# Altium PCB Sensor.PcbDoc
Units mm, origin at the board's own origin, x right, y up, seen from the top; angles counter-clockwise.
Board outline 45 x 30 mm, 4 copper layers (SIG 1, GND, PWR, SIG 2), stack 1.57 mm thick; 35 components, 31 nets, 190 pads, 119 vias.
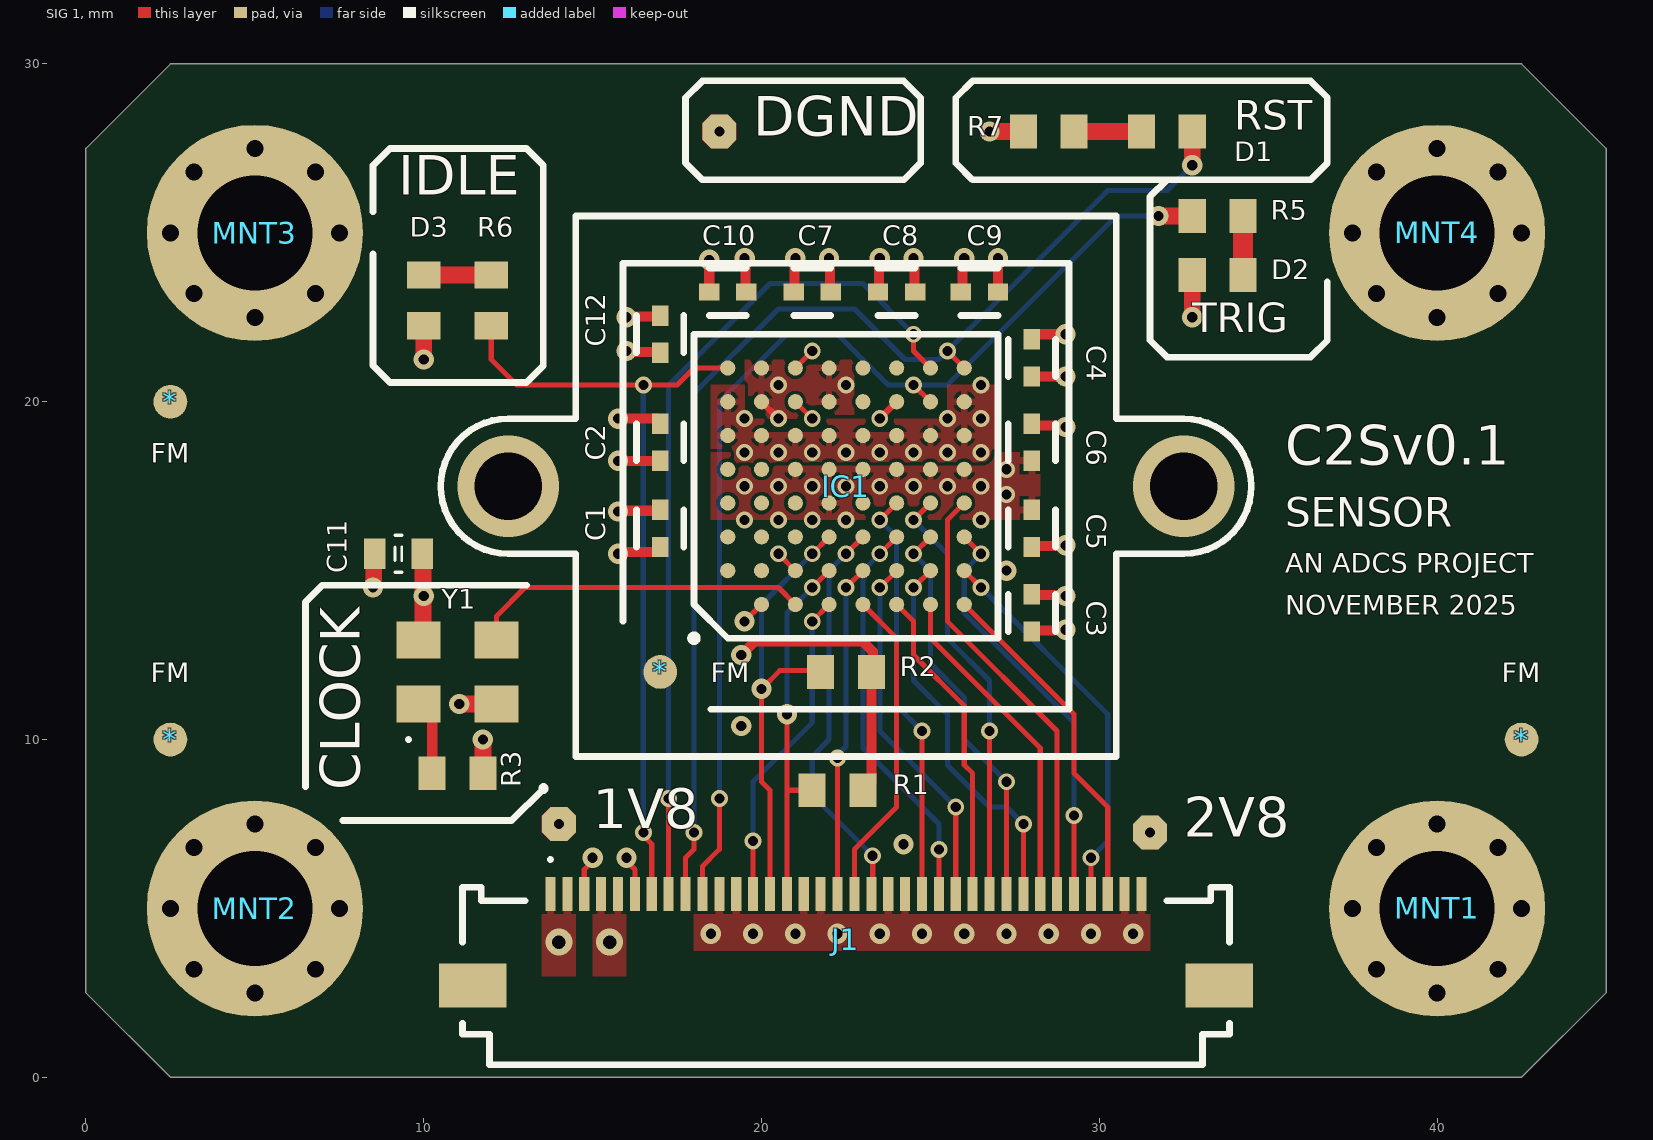
[diagram p0: SIG 1 view]
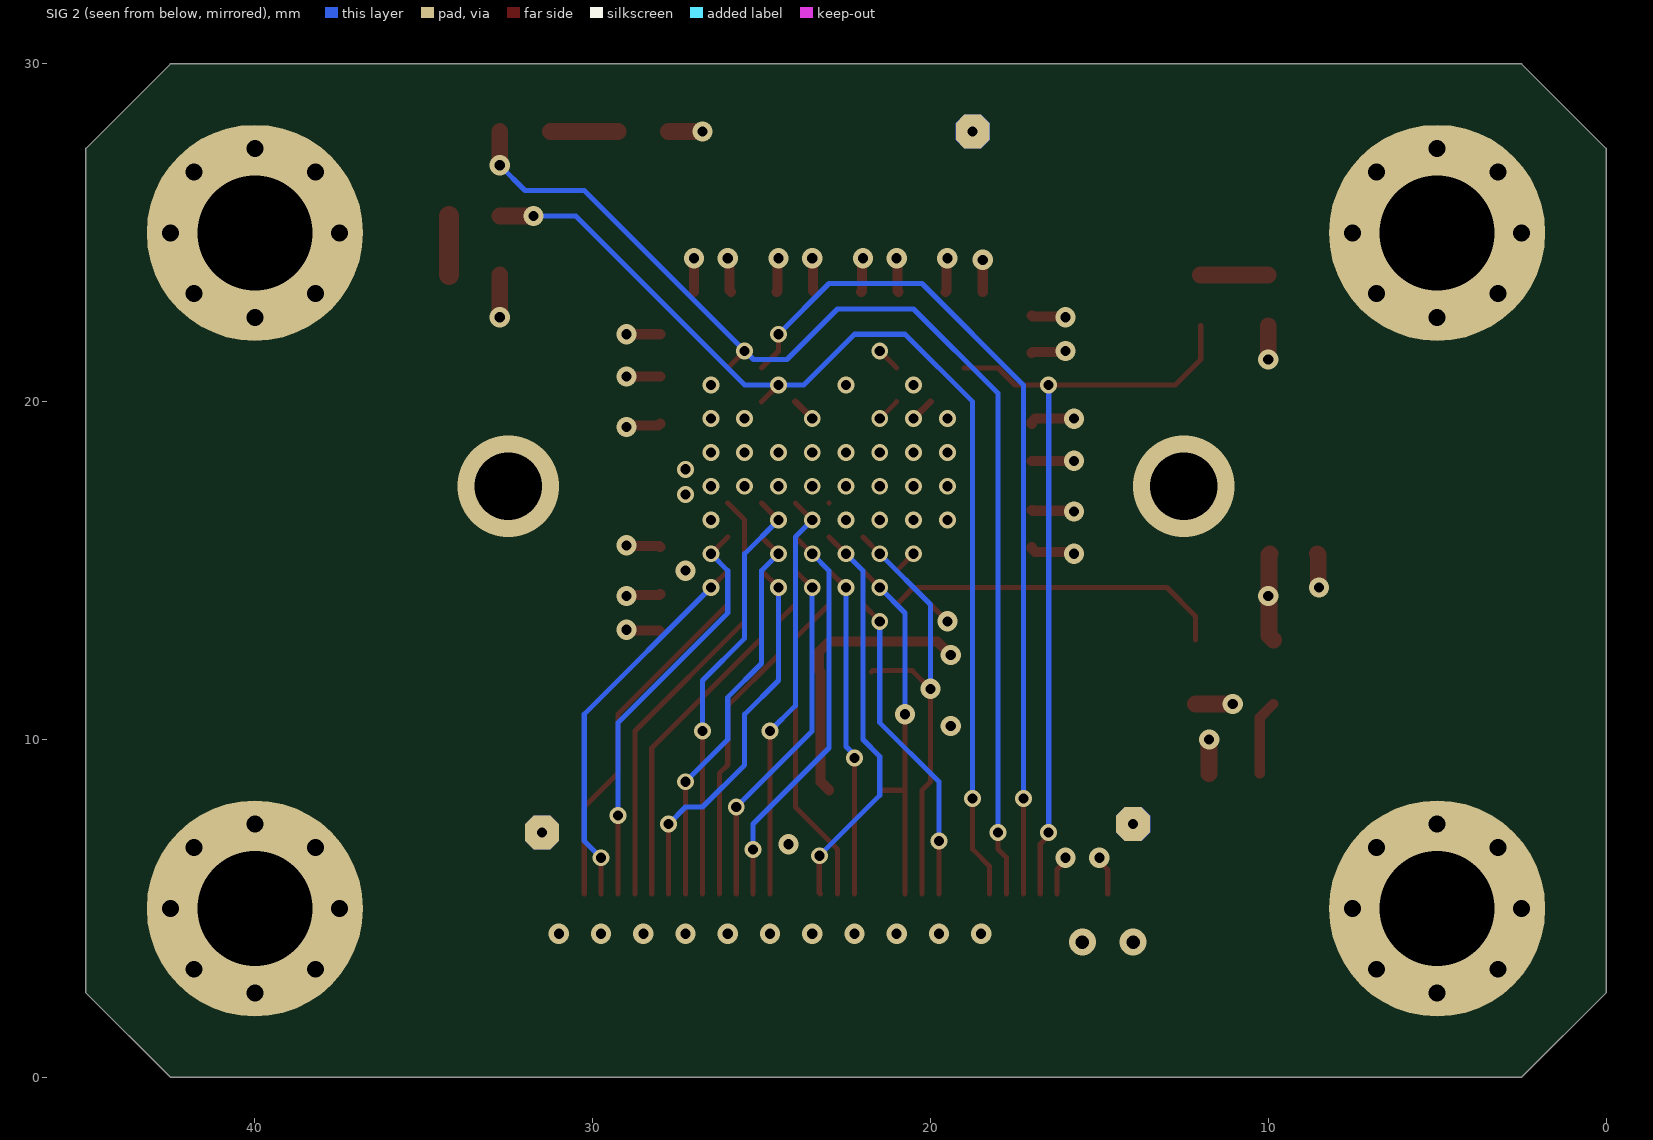
[diagram p1: SIG 2 view, seen from below]
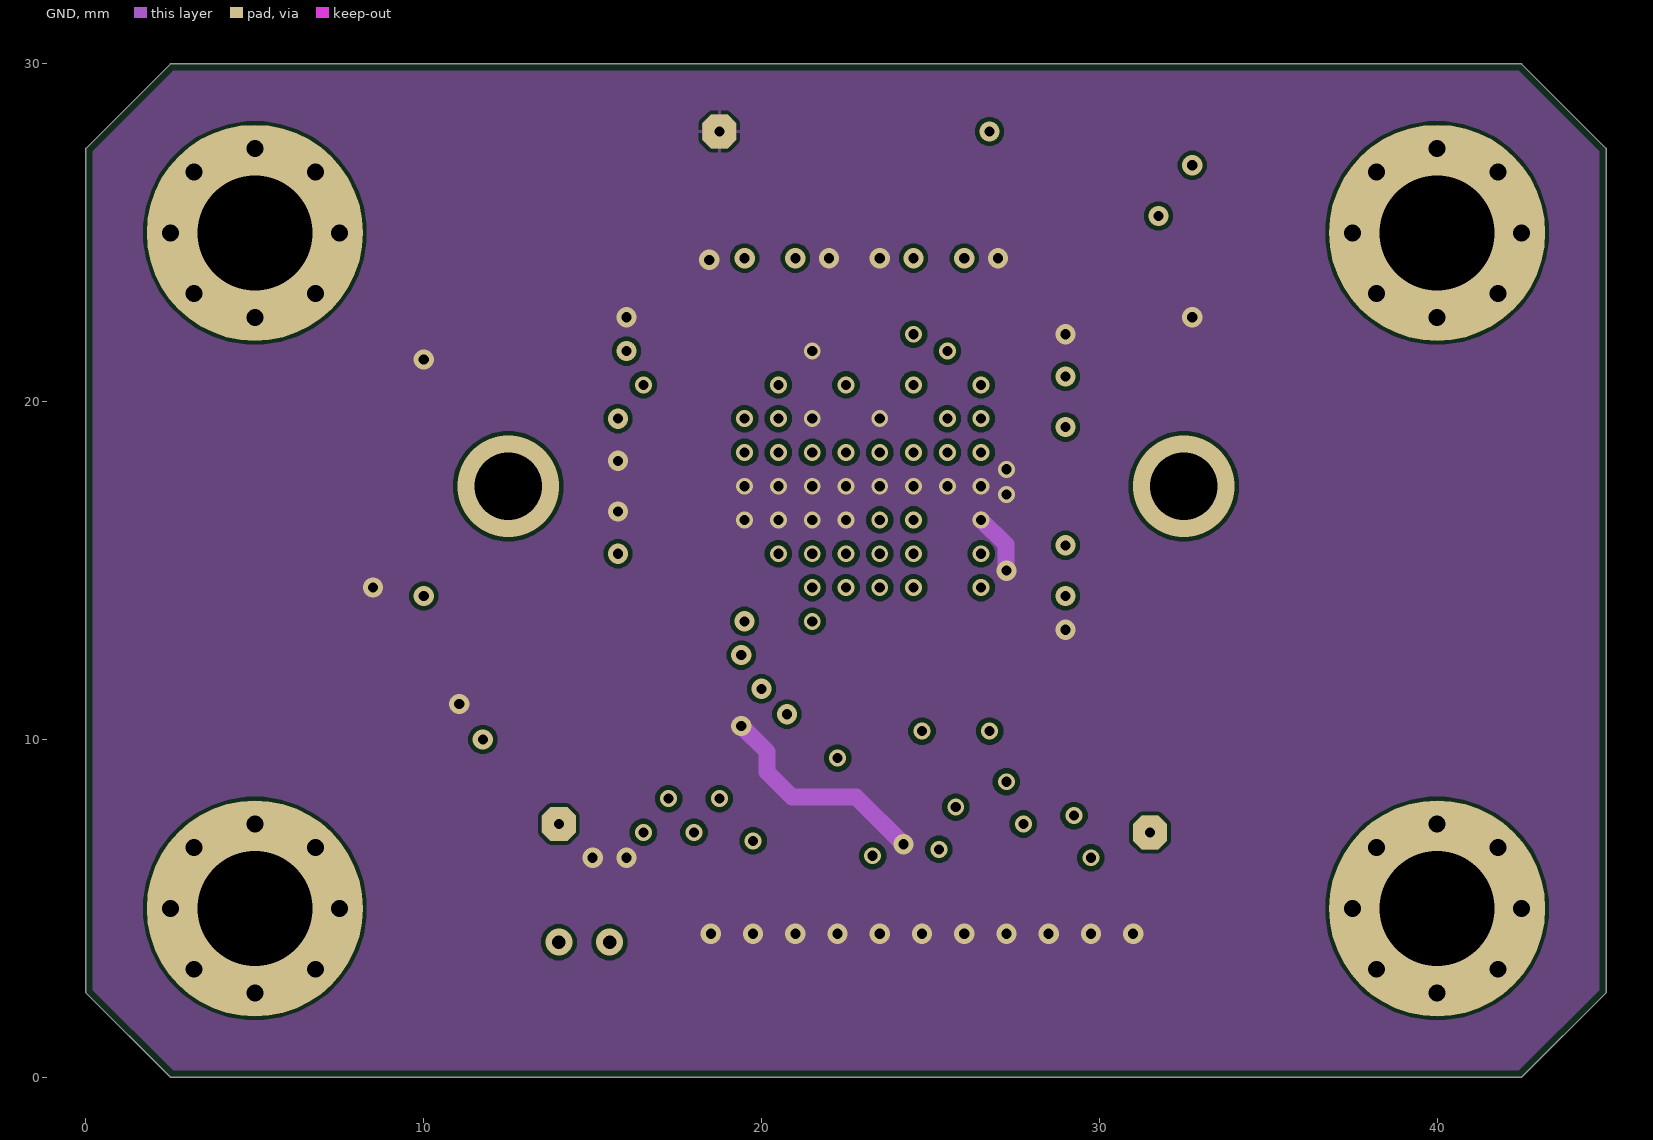
[diagram p2: GND]
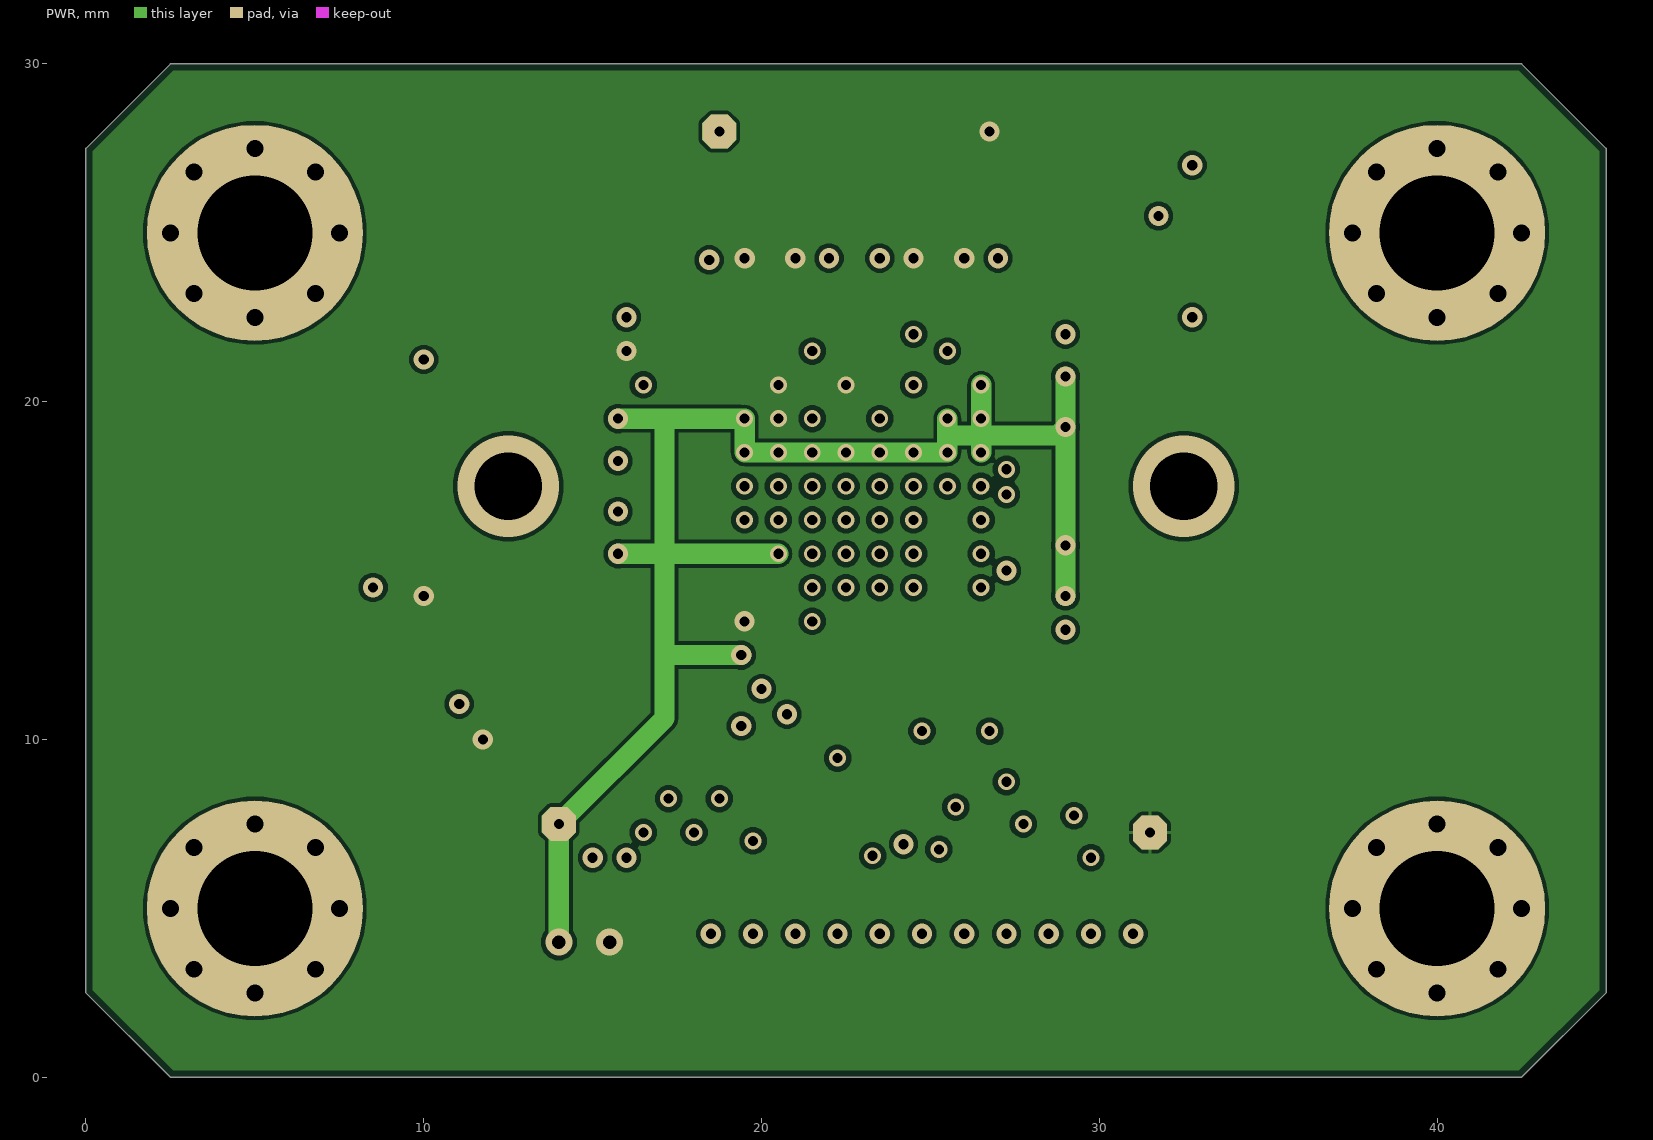
[diagram p3: PWR]
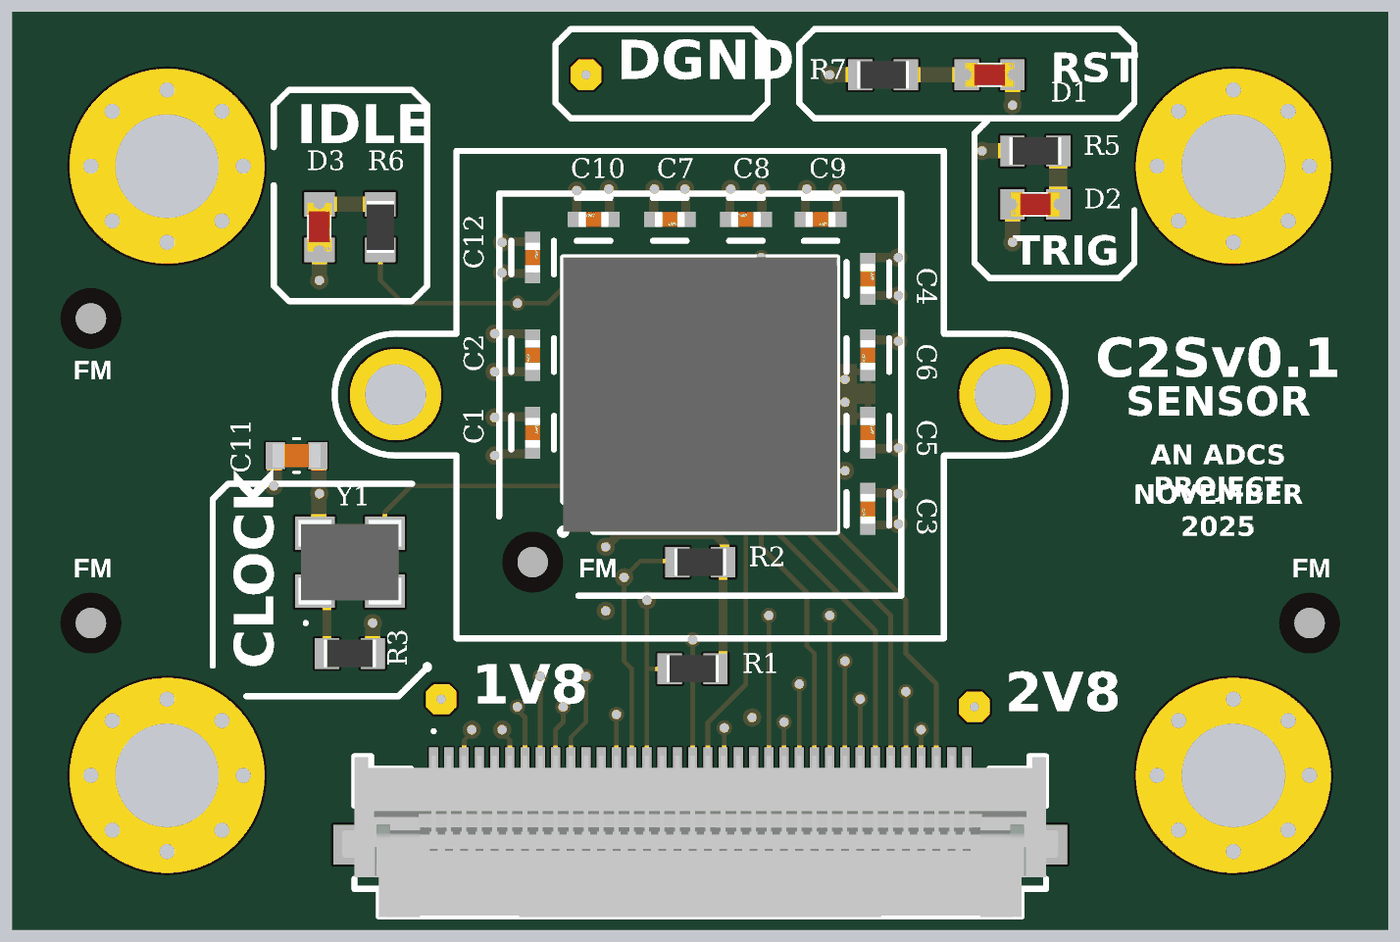
[diagram p4: 3D render of the assembled board from above, using the file's embedded part models]

## Layer stack, top to bottom
Top Solder: solder mask 0.0127, Solder Resist, Dk 3.8
SIG 1: signal copper 0.035
Dielectric 1: prepreg 0.1, 2313, Dk 4.05
GND: signal copper 0.0175
Core: core 1.265, FR-4, Dk 4.5
PWR: signal copper 0.0175
Dielectric 2: prepreg 0.1, 2313, Dk 4.05
SIG 2: signal copper 0.035
Bottom Solder: solder mask 0.0127, Solder Resist, Dk 3.8

## Board outline
0,2.5 0,27.5 2.5,30 42.5,30 45,27.5 45,2.5 42.5,0 2.5,0

## Design rules (kind name [scope] priority, off if disabled: settings)
BoardOutlineClearance [All] p1: gap=0.2 ignorepadtopadclearanceinfootprint=FALSE
Clearance [All] p1: gap=0.102 ignorepadtopadclearanceinfootprint=FALSE except(0.127: Arc-Via Track-Via SMDPad-Via THPad-Via Via-Via Via-Fill Via-Poly Via-Region Via-Text; 0.25: Arc-Hole Track-Hole SMDPad-Hole THPad-Hole Via-Hole Fill-Hole Poly-Hole Region-Hole Text-Hole)
ComponentClearance [All] p1: gap=0.102 collisioncheckmode=3 verticalgap=0.102 showdistances=TRUE
DiffPairsRouting [All] p1: maxlimit=0.102 minlimit=0.102 mostfreqgap=0.102 toplayer_minwidth=0.102 toplayer_maxwidth=1816.048 toplayer_prefwidth=0.102 midlayer1_minwidth=0.102 midlayer1_maxwidth=1816.048 midlayer1_prefwidth=0.102 midlayer2_minwidth=0.102 midlayer2_maxwidth=1816.048 midlayer2_prefwidth=0.102 bottomlayer_minwidth=0.102 bottomlayer_maxwidth=1816.048 bottomlayer_prefwidth=0.102 maxuncoupledlength=12.7
Height [All] p1: minheight=0 maxheight=1816.048 prefheight=12.7
HoleSize [All] p1: absolutevalues=TRUE maxlimit=6.3 minlimit=0.2 maxpercent=80.000 minpercent=20.000
HoleToHoleClearance [All] p1: gap=0.25 allowstackedmicrovias=FALSE
MinimumAnnularRing [All] p1: minimumring=0.076
MinimumSolderMaskSliver [All] p1: minsoldermaskwidth=0.09
PlaneClearance [All] p1: clearance=0.102
PlaneConnect PlaneConnectPowerPads [InPadClass('PowerPads')] p1: planeconnectstyle=Direct reliefexpansion=0.508 reliefentries=4 reliefconductorwidth=0.254 reliefairgap=0.254
PlaneConnect [All] p2: pad.planeconnectstyle=Relief pad.reliefexpansion=0.3 pad.reliefentries=4 pad.reliefconductorwidth=0.102 pad.reliefairgap=0.102 via.planeconnectstyle=Direct via.reliefexpansion=0.3 via.reliefentries=4 via.reliefconductorwidth=0.127 via.reliefairgap=0.127
PolygonConnect PolygonConnectPowerPads [All vs (InPadClass('PowerPads'))] p1: connectstyle=Direct reliefconductorwidth=0.254 reliefentries=4 polygonreliefangle="90 Angle" airgapwidth=0.254
PolygonConnect [All] p2: thpad.connectstyle=Relief thpad.reliefconductorwidth=0.102 thpad.reliefentries=4 thpad.polygonreliefangle="90 Angle" thpad.airgapwidth=0.102 smdpad.connectstyle=Relief smdpad.reliefconductorwidth=0.2 smdpad.reliefentries=4 smdpad.polygonreliefangle="90 Angle" smdpad.airgapwidth=0.102 via.connectstyle=Direct via.reliefconductorwidth=0.127 via.reliefentries=4 via.polygonreliefangle="90 Angle" via.airgapwidth=0.127
RoutingVias [All] p1: holewidth=0.2 width=0.45 viastyle="Through Hole" minholewidth=0.2 minwidth=0.45 maxholewidth=6.3 maxwidth=6.55
SilkToSilkClearance [All] p1: silktosilkclearance=0
SilkToSolderMaskClearance [IsPad] p1: minsilkscreentomaskgap=0.18 clearancetoexposedcopper=FALSE
SolderMaskExpansion VIA [IsVia] p1: expansion=0.102 istentingtop=TRUE
SolderMaskExpansion [All] p2: expansion=0.075 istentingtop=FALSE
SupplyNets "Schematic Supply Nets_5" [InNet('DGND')] p1: voltage=0.000
SupplyNets "Schematic Supply Nets_1" [InNet('1V8')] p2: voltage=0.000
SupplyNets "Schematic Supply Nets" [InNet('2V8')] p3: voltage=0.000
Width [All] p1: maxlimit=1816.048 minlimit=0.102 preferedwidth=0.102
20 further rules are at their usual default settings.

## Classes and differential pairs
component class U_Sensor: 1V8 2V8 * C1 C2 C3 C4 C5 C6 C7 C8 C9 C10 C11 C12 D1 D2 D3 DGND IC1 MNT1 MNT2 MNT3 MNT4 R1 R2 R3 R5 R6 R7 Y1
component class "Top Level": J1

## Components (designator, comment, footprint, x,y, rotation, side; value= is the part's Value field where it differs from the comment)
1V8 "TP_2MM" "TESTPOINT 2MM" 14,7.5 r0 top
2V8 "TP_2MM" "TESTPOINT 2MM" 31.5,7.25 r0 top
* "Fid Mark" "FID MARKER" 17,12 r90 top
* "Fid Mark" "FID MARKER" 42.5,10 r90 top
* "Fid Mark" "FID MARKER" 2.5,10 r90 top
* "Fid Mark" "FID MARKER" 2.5,20 r90 top
C1 "1uF" FP-0402-L_1_0_1-W_0_5_0_1-MFG 17,16.25 r90 top
C2 "1uF" FP-0402-L_1_0_1-W_0_5_0_1-MFG 17,18.8 r270 top
C3 "1uF" FP-0402-L_1_0_1-W_0_5_0_1-MFG 28,13.75 r270 top
C4 "1uF" FP-0402-L_1_0_1-W_0_5_0_1-MFG 28,21.3 r90 top
C5 "1uF" FP-0402-L_1_0_1-W_0_5_0_1-MFG 28,18.8 r270 top
C6 "1uF" FP-0402-L_1_0_1-W_0_5_0_1-MFG 28,16.25 r90 top
C7 "1uF" FP-0402-L_1_0_1-W_0_5_0_1-MFG 21.5,23.25 r0 top
C8 "1uF" FP-0402-L_1_0_1-W_0_5_0_1-MFG 24,23.25 r180 top
C9 "1uF" FP-0402-L_1_0_1-W_0_5_0_1-MFG 26.45,23.25 r0 top
C10 "1uF" FP-0402-L_1_0_1-W_0_5_0_1-MFG 19,23.25 r180 top
C11 "MCD-00237" C0603 9.25,15.5 r0 top value=4.7uF
C12 "1uF" FP-0402-L_1_0_1-W_0_5_0_1-MFG 17,22 r90 top
D1 "LED_0603_RED" LED_0603_RED 32,28 r180 top
D2 "LED_0603_RED" LED_0603_RED 33.5,23.75 r0 top
D3 "LED_0603_RED" LED_0603_RED 10,23 r90 top
DGND "TP_2MM" "TESTPOINT 2MM" 18.75,28 r0 top
IC1 "AR0141IRSH00SUEA0-DR" BGA63C100P8X8_900X900X140 22.5,17.5 r0 top locked
J1 "505110-3691" 5051103691 22.5,3 r0 top locked
MNT1 "M3 Mount" M3_Mount-Footprint-1 40,5 r0 top
MNT2 "M3 Mount" M3_Mount-Footprint-1 5,5 r0 top
MNT3 "M3 Mount" M3_Mount-Footprint-1 5,25 r0 top
MNT4 "M3 Mount" M3_Mount-Footprint-1 40,25 r0 top
R1 "Resistor 10k +/-1% 0603 100mW" RESC1608X55X25ML10T15-1 22.25,8.5 r0 top value=10k
R2 "Resistor 10k +/-1% 0603 100mW" RESC1608X55X25ML10T15-1 22.5,12 r0 top value=10k
R3 "Resistor 10k +/-1% 0603 100mW" RESC1608X55X25ML10T15-1 11,9 r180 top value=10k
R5 "Resistor 10k +/-1% 0603 100mW" RESC1608X55X25ML10T15-1 33.5,25.5 r180 top value=470
R6 "Resistor 10k +/-1% 0603 100mW" RESC1608X55X25ML10T15-1 12,23 r270 top value=470
R7 "Resistor 10k +/-1% 0603 100mW" RESC1608X55X25ML10T15-1 28.5,28 r180 top value=470
Y1 "ECS-TXO-3225MV-240-TR" ECSTXO3225MV240TR 11,12 r0 top

## Footprints (in the part's own frame and the unit in brackets; to place one, negate y for a bottom-side part, rotate by r counter-clockwise, add the part's x,y. Pads: shape width x height; smd on the part's side, far side on the other; paste and mask are expansions set on the pad)
5051103691 [mm]
  rect 0.3x1 smd mask+0.051: 1(-8.75,2.425) 2(-8.25,2.425) 3(-7.75,2.425) 4(-7.25,2.425) 5(-6.75,2.425) 6(-6.25,2.425) 7(-5.75,2.425) 8(-5.25,2.425) 9(-4.75,2.425) 10(-4.25,2.425) 11(-3.75,2.425) 12(-3.25,2.425) 13(-2.75,2.425) 14(-2.25,2.425) 15(-1.75,2.425) 16(-1.25,2.425) 17(-0.75,2.425) 18(-0.25,2.425) 19(0.25,2.425) 20(0.75,2.425) 21(1.25,2.425) 22(1.75,2.425) 23(2.25,2.425) 24(2.75,2.425) 25(3.25,2.425) 26(3.75,2.425) 27(4.25,2.425) 28(4.75,2.425) 29(5.25,2.425) 30(5.75,2.425) 31(6.25,2.425) 32(6.75,2.425) 33(7.25,2.425) 34(7.75,2.425) 35(8.25,2.425) 36(8.75,2.425)
  rect 2x1.3 smd: MP1(-11.05,-0.275) MP2(11.05,-0.275)
  silkscreen extent -11.35,-2.63 11.35,3.5, body extent -11.75,-2.65 11.75,2.65, height 1.9
BGA63C100P8X8_900X900X140 [mm]
  round 0.45 smd: A2(-3.5,-2.5) A3(-3.5,-1.5) A4(-3.5,-0.5) A5(-3.5,0.5) A6(-3.5,1.5) A7(-3.5,2.5) A8(-3.5,3.5) B1(-2.5,-3.5) B2(-2.5,-2.5) B3(-2.5,-1.5) B4(-2.5,-0.5) B5(-2.5,0.5) B6(-2.5,1.5) B7(-2.5,2.5) B8(-2.5,3.5) C1(-1.5,-3.5) C2(-1.5,-2.5) C3(-1.5,-1.5) C4(-1.5,-0.5) C5(-1.5,0.5) C6(-1.5,1.5) C7(-1.5,2.5) C8(-1.5,3.5) D1(-0.5,-3.5) D2(-0.5,-2.5) D3(-0.5,-1.5) D4(-0.5,-0.5) D5(-0.5,0.5) D6(-0.5,1.5) D7(-0.5,2.5) D8(-0.5,3.5) E1(0.5,-3.5) E2(0.5,-2.5) E3(0.5,-1.5) E4(0.5,-0.5) E5(0.5,0.5) E6(0.5,1.5) E7(0.5,2.5) E8(0.5,3.5) F1(1.5,-3.5) F2(1.5,-2.5) F3(1.5,-1.5) F4(1.5,-0.5) F5(1.5,0.5) F6(1.5,1.5) F7(1.5,2.5) F8(1.5,3.5) G1(2.5,-3.5) G2(2.5,-2.5) G3(2.5,-1.5) G4(2.5,-0.5) G5(2.5,0.5) G6(2.5,1.5) G7(2.5,2.5) G8(2.5,3.5) H1(3.5,-3.5) H2(3.5,-2.5) H3(3.5,-1.5) H4(3.5,-0.5) H5(3.5,0.5) H6(3.5,1.5) H7(3.5,2.5) H8(3.5,3.5)
  silkscreen extent -12,-8 12,8, body extent -4.5,-4.5 4.5,4.5, height 1.4
C0603 [mm]
  rect 0.64x0.89 smd mask+0.05: 1(-0.7,0) 2(0.7,0)
  silkscreen extent -0.1,-0.55 0.1,0.55, body extent -0.9,-0.5 0.9,0.5, height 1.4
ECSTXO3225MV240TR [mm]
  rect 1.3x1.1 smd: 1(-1.15,-0.95) 2(1.15,-0.95) 3(1.15,0.95) 4(-1.15,0.95)
  silkscreen extent -1.5,-2.05 -1.4,-1.95, body extent -1.69,-1.39 1.69,1.39, height 1.3
"FID MARKER" [mm]
  round 1 smd mask+0.5: 3(0,0)
FP-0402-L_1_0_1-W_0_5_0_1-MFG [mm]
  rect 0.6x0.5 smd paste+0 mask+0: 1(-0.55,0) 2(0.55,0)
  silkscreen extent -0.55,-0.7 0.55,0.7, body extent -0.95,-0.4 0.95,0.4, height 0.25
LED_0603_RED [mm]
  rect 0.8x1 smd: A(0.75,0) K(-0.75,0)
  body extent -0.8,-0.4 0.8,0.4, height 0.6
M3_Mount-Footprint-1 [mm]
  round 0.8 hole 0.5: 1(-2.5,0) 1(-1.8,-1.8) 1(-1.8,1.8) 1(0,-2.5) 1(0,2.5) 1(1.8,-1.8) 1(1.8,1.8) 1(2.5,0)
  round 6.4 hole 3.4: 1(0,0)
RESC1608X55X25ML10T15-1 [mm] "Chip Resistor, 2-Leads, Body 1.70x0.90mm, IPC Low Density"
  rect 0.8x1 smd: 1(-0.75,0) 2(0.75,0)
  body extent -0.85,-0.45 0.85,0.45, height 0.55
"TESTPOINT 2MM" [mm]
  oct 1x1 hole 0.3: TP(0,0)
  SIG 1 region: -0.25,-0.5 -0.5,-0.25 -0.5,0.25 -0.25,0.5 0.25,0.5 0.5,0.25 0.5,-0.25 0.25,-0.5
  GND region: -0.25,-0.5 -0.5,-0.25 -0.5,0.25 -0.25,0.5 0.25,0.5 0.5,0.25 0.5,-0.25 0.25,-0.5
  PWR region: -0.25,-0.5 -0.5,-0.25 -0.5,0.25 -0.25,0.5 0.25,0.5 0.5,0.25 0.5,-0.25 0.25,-0.5
  SIG 2 region: -0.25,-0.5 -0.5,-0.25 -0.5,0.25 -0.25,0.5 0.25,0.5 0.5,0.25 0.5,-0.25 0.25,-0.5

## Part data
C1 C2 C3 C4 C5 C6 C7 C8 C9 C10 C12: library part CMP-04427-002736-1, "General Purpose Ceramic Capacitor, 0402, 1uF, 20%, X5R, 15%, 16V", Case/Package=0402, Dielectric=X5R, Max Operating Temperature=85°C, Min Operating Temperature=-55°C, Package Quantity=10000, Tolerance=20%, Voltage Rating (DC)=16V, Capacitance=1uF, Packaging="Tape and Reel", RoHS Compliant=Yes
C11: library part CMP-112-000001-1, "Capacitor, MLCC, 100nF, 6V3, X5R, 10%, 0603, T=0,8mm", Manufacturer=YAGEO, Manufacturer Part Number=CC0603KRX5R5BB104, Package=C0603, Component Type=Capacitors, ComponentLink1Description=Datasheet, ComponentLink1URL=http://tunmcdsvn.tun.st.com/Component_Datasheet_Library/Trunk/Capacitors/Yageo_Multilayer_capacitor_X5R_series_100pF_to_100uF, Design Item ID=MCD-00237, ECCN_EU=NEC, ECCN_US=EAR99, Internal_Part_Number=MCD-00237, Manufacturer_Part_Number=CC0603KRX5R5BB104, Part_Type=Capacitor, Pin Count=2, Provided_By=SUBCO, Source=MB1364.SCHLIB, Status=Released
D1 D2 D3: library part CMP-007-000026-1, "LED 0603 RED SMD", Design Item ID=LED_0603_RED, Source=Schematic-Lib-PhilsLab.SchLib
IC1: "Integrated Circuit", Manufacturer_Name=onsemi, Datasheet Link=https://au.mouser.com/datasheet/2/308/1/ONSM_S_A0003550741_1-2560416.pdf, Height=1.4mm, Manufacturer_Part_Number=AR0141IRSH00SUEA0-DR
J1: "Connector", Manufacturer_Name=Molex, Mouser Part Number=N/A, Datasheet Link=https://www.molex.com/content/dam/molex/molex-dot-com/products/automated/en-us/salesdrawingpdf/505/505110/5051103691_sd.pdf, Height=2.1mm, Manufacturer_Part_Number=505110-3691, Mouser Price/Stock=https://www.mouser.com/Search/Refine.aspx?Keyword=N%2FA
MNT1 MNT2 MNT3 MNT4: library part CMP-002-00124-2, "M3 mounting hole", Author="Raphael Ho"
R1 R2 R3 R5 R6 R7: library part CMP-009-00181-1, "Chip Resistor, 10k Ohm, 0.1 W, -55 to 155 degC, 0603 (1608 Metric)", Case/Package=0603, Max Operating Temperature=155°C, Min Operating Temperature=-55°C, Power=100mW, Tolerance=1%, Voltage Rating=50V, Created by="Micah Randall", Design Item ID=CMP-009-00006-5, Mounting Technology=SM, Pins=2, RoHS Compliant=Yes, Source="Components - 14.11.22 - 11.28.SchLib"
Y1: "Crystal or Oscillator", Manufacturer_Name=ECS, Mouser Part Number=520-TXO-3225MV-240-T, Arrow Part Number=ECS-TXO-3225MV-240-TR, Arrow Price/Stock=https://www.arrow.com/en/products/ecs-txo-3225mv-240-tr/ecs-international?region=nac, Datasheet Link=https://eu.mouser.com/datasheet/2/122/ECS-TXO-3225MV-1634330.pdf, Height=1.2mm, Manufacturer_Part_Number=ECS-TXO-3225MV-240-TR, Mouser Price/Stock=https://www.mouser.co.uk/ProductDetail/ECS/ECS-TXO-3225MV-240-TR?qs=d0WKAl%252BL4KYXn7UuwSFJGQ%3D%3D

## Via types
v1: diameter 0.5, hole 0.3, SIG 1 to SIG 2, tented both sides, 66 vias
v2: diameter 0.6, hole 0.3, SIG 1 to SIG 2, tented both sides, 49 vias
v3: diameter 3, hole 2, SIG 1 to SIG 2, 2 vias
v4: diameter 0.8, hole 0.4, SIG 1 to SIG 2, tented both sides, 2 vias

## Nets (pads, with @x,y where several pads share a name; then routed paths per layer and width w, separated by ;. In a path a pad name is that pad's centre, name@x,y a point inside that pad or via, vN(x,y) a via of type N, cw(c..) or ccw(c..) an arc to the next point about the centre after c; other vN are vias at no path point)
1V8: 1V8.TP C1.1 C2.1 C3.1 C4.1 C5.1 C6.1 IC1.A6 IC1.A7 IC1.B6 IC1.C2 IC1.C6 IC1.D6 IC1.E6 IC1.F6 IC1.G6 IC1.H6 IC1.H7 J1.1 J1.2 R1.2 R2.2 | length 63.5
  SIG 1 w0.152: v1(20.5,15.5) IC1.C2
  SIG 1 w0.3: v2(15.75,15.5) 15.807,15.557 16.9,15.557 17,15.657 C1.1 ; v2(15.75,19.5) 16.85,19.5 16.9,19.5 17,19.4 C2.1 ; v2(19.4,12.5) 19.8,12.9 23,12.9 23.3,12.6 23.3,12.05 R2.2 23.25,8.75 R1.2 ; C3.1 28.025,14.275 28.975,14.275 v2(29,14.25) ; C6.1 28.025,15.725 28.975,15.725 v2(29,15.75) ; C5.1 28.05,19.3 28.95,19.3 v2(29,19.25) ; C4.1 v2(29,20.75)
  PWR w0.6: v4(14,4) 1V8.TP 17.128,10.628 17.128,12.5 ; v2(15.75,15.5) 17.128,15.5 ; v2(15.75,19.5) 17.128,19.5 ; v2(19.4,12.5) 17.128,12.5 ; v1@19.406,19.5 17.128,19.5 ; v1(19.5,19.5) v1(19.5,18.5) v1(20.5,18.5) v1(21.5,18.5) v1(22.5,18.5) v1(23.5,18.5) v1(24.5,18.5) v1(25.5,18.5) 25.5,19 ; v1(20.5,15.5) 17.128,15.5 ; v1(25.5,19.5) 25.5,19 ; v1(26.5,18.5) 26.5,19 ; v1(26.5,20.5) v1(26.5,19.5) 26.5,19 ; v2(29,14.25) v2(29,15.75) v2(29,19.25) ; v2(29,20.75) v2(29,19.25) ; 17.128,12.5 17.128,15.5 ; 17.128,15.5 17.128,19.5 ; 25.5,19 26.5,19 ; 26.5,19 28.75,19 v2(29,19.25)
2V8: 2V8.TP C7.1 C8.1 C9.1 C10.1 C11.2 C12.1 IC1.B1 IC1.B7 IC1.B8 IC1.D7 IC1.D8 J1.4 J1.5 R3.1 R7.2 Y1.4 | length 11.2
  SIG 1 w0.152: v2(19.497,13.5) v2(19.497,13.5) 19.998,14 IC1.B1
  SIG 1 w0.2: IC1.B7 v1(20.5,19.5)
  SIG 1 w0.3: v2(16,21.5) 16.025,21.475 16.975,21.475 C12.1 ; v2(19.5,24.25) 19.525,24.225 19.525,23.275 C10.1 ; C7.1 20.975,23.275 20.975,24.225 v2(21,24.25) ; v2(24.5,24.25) 24.525,24.225 24.525,23.275 C8.1 ; C9.1 25.95,23.3 25.95,24.2 v2(26,24.25)
  SIG 1 w0.5: Y1.4 9.981,13.081 9.981,14.231 v2(10,14.25) 9.981,14.269 9.981,15.469 C11.2 ; R3.1 v2(11.75,10) ; v2(26.75,28) R7.2
  other v1: 20.5,20.5 22.5,20.5
  other v4: 15.5,4
AR_CLK: IC1.C1 Y1.3 | length 10.1
  SIG 1 w0.152: Y1.3 12.15,13.65 13,14.5 20.5,14.5 IC1.C1
DGND: C1.2 C2.2 C3.2 C4.2 C5.2 C6.2 C7.2 C8.2 C9.2 C10.2 C11.1 C12.2 D2.K D3.K DGND.TP IC1.C5 IC1.C7 IC1.C8 IC1.D4 IC1.D5 IC1.E5 IC1.F5 IC1.F7 IC1.G5 IC1.H5 J1.3 J1.6 J1.11 J1.12 J1.16 J1.17 J1.21 J1.22 J1.35 J1.36 Y1.2 | length 26.8
  SIG 1 w0.152: J1.3 14.75,6.154 15,6.404 v2(15,6.5) ; v2(16,6.5) 16,6.404 16.25,6.154 J1.6 ; IC1.C7 v1(21.5,19.5) ; IC1.C8 v1(21.5,21.5)
  SIG 1 w0.2: v1(23.5,19.5) IC1.F7
  SIG 1 w0.3: v2(15.75,16.75) 15.775,16.775 16.975,16.775 C1.2 ; v2(15.75,18.25) C2.2 ; v2(16,22.5) 16.025,22.525 16.975,22.525 C12.2 ; C10.2 v2(18.45,24.2) ; v2(22,24.25) 22.025,24.225 22.025,23.275 C7.2 ; C8.2 23.475,23.275 23.475,24.225 v2(23.5,24.25) ; C9.2 v2(27,24.25) ; C3.2 28.025,13.225 28.975,13.225 v2(29,13.25) ; C4.2@28,22 v2(29,22)
  SIG 1 w0.5: v2(8.5,14.5) 8.519,14.519 8.519,15.469 C11.1 ; v2(10,21.25) D3.K ; v2(11.05,11.05) Y1.2 ; v2(32.75,22.5) D2.K
  GND w0.5: v2(19.4,10.4) 20.16,9.64 20.16,9.04 20.9,8.3 22.8,8.3 v2(24.2,6.9) v2@24.173,6.9 ; v1(26.5,16.5) 27.231,15.769 27.231,15.019 v2(27.25,15)
  other v1: 19.5,16.5 20.5,16.5 21.5,16.5 22.5,16.5 27.25,17.25 19.5,17.5 20.5,17.5 21.5,17.5 22.5,17.5 23.5,17.5 24.5,17.5 25.5,17.5 26.5,17.5 27.25,18
  other v2: 18.5,4.25 19.75,4.25 21,4.25 22.25,4.25 23.5,4.25 24.75,4.25 26,4.25 27.25,4.25 28.5,4.25 29.75,4.25 31,4.25
FLASH: IC1.E4 | length 0
FRAME_VALID: IC1.E2 J1.18 | length 9.9
  SIG 1 w0.152: J1.18 v1(22.25,9.45) ; v1(22.5,14.5) IC1.E2
  SIG 2 w0.152: v1(22.25,9.45) 22.25,9.544 22.5,9.794 v1(22.5,14.5)
LINE_VALID: IC1.E1 J1.19 | length 9.5
  SIG 1 w0.152: J1.19 22.75,6.75 24,8 24,13 IC1.E1
NetD1_A: D1.A R7.1 | length 2
  SIG 1 w0.5: R7.1 D1.A
NetD2_A: D2.A R5.1 | length 1.7
  SIG 1 w0.6: D2.A R5.1
NetD3_A: D3.A R6.1 | length 2
  SIG 1 w0.5: D3.A R6.1
NetIC1_F1: IC1.F1 J1.26 | length 9.5
  SIG 1 w0.152: IC1.F1 24.5,13.5 24.5,12.5 26,11 26,9.25 26.25,9 J1.26
NetIC1_F2: IC1.F2 J1.25 | length 10.7
  SIG 1 w0.152: v1(23.5,14.5) IC1.F2 ; J1.25 v1(25.75,8)
  SIG 2 w0.152: v1(23.5,14.5) 23.504,14.496 23.504,10.246 v1(25.75,8)
NetIC1_F3: IC1.F3 J1.24 | length 11.9
  SIG 1 w0.152: v1(23.5,15.5) IC1.F3 ; J1.24 v1(25.25,6.75)
  SIG 2 w0.152: v1(23.5,15.5) 23,15 23,9.75 25.25,7.5 v1(25.25,6.75)
NetIC1_F4: IC1.F4 J1.23 | length 12.3
  SIG 1 w0.152: v1(23.5,16.5) IC1.F4 ; J1.23 v1(24.75,10.25)
  SIG 2 w0.152: v1(23.5,16.5) 24,16 24,11 v1(24.75,10.25)
NetIC1_G1: IC1.G1 J1.30 | length 9.9
  SIG 1 w0.152: IC1.G1 25,13 28.25,9.75 J1.30
NetIC1_G2: IC1.G2 J1.29 | length 11.4
  SIG 1 w0.152: v1(24.5,14.5) IC1.G2 ; J1.29 v1(27.75,7.5)
  SIG 2 w0.152: v1(24.5,14.5) 24.5,11.75 25.5,10.75 25.5,9.25 26.75,8 27.25,8 v1(27.75,7.5)
NetIC1_G3: IC1.G3 J1.28 | length 11.9
  SIG 1 w0.152: v1(24.5,15.5) IC1.G3 ; J1.28 v1(27.25,8.75)
  SIG 2 w0.152: v1(24.5,15.5) 25,15 25,12.25 26,11.25 26,10 v1(27.25,8.75)
NetIC1_G4: IC1.G4 J1.27 | length 12.7
  SIG 1 w0.152: v1(24.5,16.5) IC1.G4 ; J1.27 v1(26.75,10.25)
  SIG 2 w0.152: v1(24.5,16.5) 25.5,15.5 25.5,13 26.75,11.75 v1(26.75,10.25)
NetIC1_H1: IC1.H1 J1.34 | length 10.3
  SIG 1 w0.152: IC1.H1 29.25,10.75 29.25,9 30.25,8 J1.34
NetIC1_H2: IC1.H2 J1.33 | length 11.5
  SIG 1 w0.152: IC1.H2 v1(26.5,14.5) ; J1.33 v1(29.75,6.5)
  SIG 2 w0.152: v1(26.5,14.5) 30.25,10.75 30.25,7 v1(29.75,6.5)
NetIC1_H3: IC1.H3 J1.32 | length 12.3
  SIG 1 w0.152: IC1.H3 v1(26.5,15.5) ; J1.32 v1(29.25,7.75)
  SIG 2 w0.152: v1(26.5,15.5) 26,15 26,13.75 29.25,10.5 v1(29.25,7.75)
NetIC1_H4: IC1.H4 J1.31 | length 13.1
  SIG 1 w0.152: IC1.H4 25.5,16.5 25.5,13.5 28.75,10.25 J1.31
NetR3_2: R3.2 Y1.1 | length 2.2
  SIG 1 w0.3: Y1.1 10.25,10.65 R3.2
OEBAR: IC1.G8 J1.8 | length 25.4
  SIG 1 w0.152: J1.8 v1(17.25,8.25) ; v1(24.5,22) 24.5,21.5 IC1.G8
  SIG 2 w0.152: v1(17.25,8.25) 17.25,20.5 20.25,23.5 23,23.5 v1(24.5,22)
PIX_CLK: IC1.E3 J1.20 | length 12
  SIG 1 w0.152: v1(22.5,15.5) IC1.E3 ; J1.20 23.29,5.465 v1(23.29,6.56)
  SIG 2 w0.152: v1(22.5,15.5) 22,15 22,10 21.5,9.5 21.5,8.35 v1(23.29,6.56)
RESETBAR: D1.K IC1.H8 J1.9 | length 35.4
  SIG 1 w0.152: J1.9 17.75,6.5 18,6.75 v1(18,7.25) ; v1(25.5,21.5) IC1.H8
  SIG 1 w0.5: v2(32.75,27) D1.K
  SIG 2 w0.152: v1(18,7.25) 18,20.25 20.5,22.75 22.75,22.75 24.25,21.25 25.237,21.25 25.487,21.5 v1(25.5,21.5) 30.25,26.25 32,26.25 v2(32.75,27)
SADDR: IC1.D1 J1.13 | length 9.5
  SIG 1 w0.152: J1.13 v1(19.75,7) ; v1(21.5,13.5) IC1.D1
  SIG 2 w0.152: v1(19.75,7) 19.75,8.75 21.5,10.5 v1(21.5,13.5)
SCLK: IC1.D2 J1.15 R1.1 | length 10.8
  SIG 1 w0.152: J1.15 20.75,8.5 ; v2(20.75,10.75) 20.75,8.5 ; R1.1 20.75,8.5 ; v1(21.5,14.5) IC1.D2
  SIG 2 w0.152: v2(20.75,10.75) 20.75,13.75 v1(21.5,14.5)
SDATA: IC1.D3 J1.14 R2.1 | length 13.5
  SIG 1 w0.152: J1.14 20.25,8.5 20,8.75 v2(20,11.5) 20.539,12.039 21.711,12.039 R2.1 ; v1(21.5,15.5) IC1.D3
  SIG 2 w0.152: v2(20,11.5) 20,14 v1(21.5,15.5)
STANDBY: IC1.A8 J1.7 R6.2 | length 23.7
  SIG 1 w0.152: R6.2 12,21.25 12.75,20.5 v1(16.5,20.5) 17.498,20.5 17.998,21 IC1.A8 ; v1(16.5,7.25) 16.5,7.156 16.75,6.906 J1.7
  SIG 2 w0.152: v1(16.5,7.25) v1(16.5,20.5)
TRIGGER: IC1.G7 J1.10 R5.2 | length 33
  SIG 1 w0.152: J1.10 18.25,6.25 18.75,6.75 v1(18.75,8.25) ; v1(24.5,20.5) IC1.G7
  SIG 1 w0.5: v2(31.75,25.5) R5.2
  SIG 2 w0.152: v1(18.75,8.25) 18.75,20 20.75,22 22.25,22 23.75,20.5 v1(24.5,20.5) 25.5,20.5 30.5,25.5 v2(31.75,25.5)
pads on no net: *.3 IC1.A2 IC1.A3 IC1.A4 IC1.A5 IC1.B2 IC1.B3 IC1.B4 IC1.B5 IC1.C3 IC1.C4 IC1.E7 IC1.E8 IC1.F8 J1.MP1 J1.MP2 MNT1.1 MNT2.1 MNT3.1 MNT4.1
copper on no net:
  other v3: 12.5,17.5 32.5,17.5

## Polygon pours and split planes (outlines as drawn)
2V8 on SIG 1 "2V8_L01_P010" (solid, pour order 10): 19.5,19.5 19.5,21.25 22.75,21.25 22.75,19.5
1V8 on SIG 1 "1V8_L01_P009" (solid, pour order 9): 27,18.103 27,20.5 25.5,20.5 25.5,19.5 19.5,19.5 19.5,20.5 18.5,20.5 18.5,18.103
DGND on SIG 1 "DGND_L01_P008" (solid, pour order 8): 18.5,18.5 18.5,16.5 28.25,16.5 28.25,18.5
DGND on SIG 1 "DGND_L01_P007" (solid, pour order 7): 18,6 18,3.75 31.5,3.75 31.5,6
2V8 on SIG 1 "2V8_L01_P003" (solid, pour order 3): 15,6 16,6 16,3 15,3
1V8 on SIG 1 "1V8_L01_P002" (solid, pour order 2): 14.5,6 14.5,3 13.5,3 13.5,6
DGND on GND "DGND_L02_P001" (solid, pour order 1): 45,7.5 45,22.5 45,27.5 42.5,30 2.5,30 0,27.5 0,22.5 0,7.5 0,2.5 2.5,0 42.5,0 45,2.5
2V8 on PWR "2V8_L03_P014" (solid, pour order 14): 45,7.5 45,22.5 45,27.5 42.5,30 2.5,30 0,27.5 0,22.5 0,7.5 0,2.5 2.5,0 42.5,0 45,2.5

## Silkscreen, mask and mechanical layers (free items; w line width, h text height)
Top Overlay:
  lines w0.2: 6.5,8.6 6.5,14.071 7,14.571 13.04,14.571 ; 7.6,7.6 12.6,7.6 13.54,8.54 ; 8.5,24.377 8.5,21.071 9,20.571 13.04,20.571 13.54,21.071 13.54,27 13.04,27.5 9,27.5 8.5,27 8.5,25.623 ; 36.75,23.55 36.75,21.821 36.25,21.321 32,21.321 31.5,21.821 31.5,26.071 32,26.571 36.25,26.571 ; 36.25,26.571 26.25,26.571 25.75,27.071 25.75,29 26.25,29.5 36.25,29.5 36.75,29 36.75,27.071 36.25,26.571 ; 17.75,27.071 17.75,29 18.25,29.5 24.21,29.5 24.71,29 24.71,27.071 24.21,26.571 18.25,26.571 17.75,27.071
  lines w0.3: 13.54,8.54 13.54,8.571
  text "RST" at 34,27.762 h1.5
  text "IDLE" at 9.25,25.75 h2
  text "TRIG" at 32.75,21.762 h1.5
  text "FM" at 1.92,18 h1
  text "C2Sv0.1" at 35.5,17.75 h2
  text "SENSOR" at 35.5,16 h1.5
  text "AN ADCS PROJECT" at 35.5,14.75 h1
  text "NOVEMBER 2025" at 35.5,13.5 h1
  text "FM" at 1.92,11.5 h1
  text "FM" at 18.5,11.5 h1
  text "FM" at 41.92,11.5 h1
  text "CLOCK" at 8.483,8.5 h2 r90
Board Shape:
  the board outline again, w0.15

## Text inside footprints (layer, text, board x,y; h text height)
D1: Top Assembly "+" at 30.683,27.392 h0.5 r180
D2: Top Assembly "+" at 34.817,24.358 h0.5
D3: Top Assembly "+" at 9.392,24.317 h0.5 r90